# Altium PCB 606-100868-r02.pcbdoc (part 2 of 2)
Units mm, origin at the board's own origin, x right, y up, seen from the top; angles counter-clockwise.
Board outline 50 x 10 mm, 2 copper layers (Top Layer, Bottom Layer), stack 1.471 mm thick; 23 components, 9 nets, 72 pads, 29 vias.
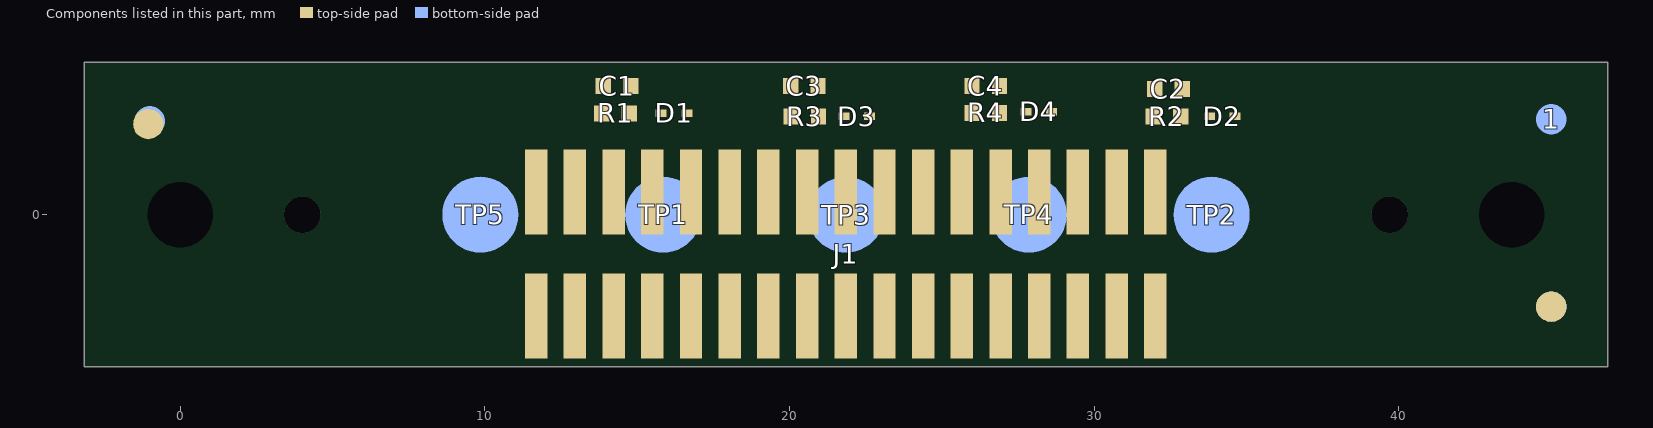
[diagram p2: the components of this part, seen from the top]

## Silkscreen, mask and mechanical layers (free items; w line width, h text height) (continued)
DXF_BOT:
  circle w0.013: c33.321,27 r1.25
  circle w0.013: c27.321,27 r1.25
  circle w0.013: c21.321,27 r1.25
  circle w0.013: c15.321,27 r1.25
  circle w0.013: c9.321,27 r1.25
  circle w0.013: c-0.529,27 r1.075
  circle w0.013: c39.171,27 r0.6
  circle w0.013: c-0.529,27 r2.1
  circle w0.013: c3.471,27 r0.6
  circle w0.013: c43.171,27 r2.1
  circle w0.013: c43.171,27 r1.075
  circle w0.013: c39.7,0 r0.6
  circle w0.013: c4,0 r0.6
  circle w0.013: c43.7,0 r2.1
  circle w0.013: c0,0 r2.1
  circle w0.013: c0,0 r1.075
  circle w0.013: c43.7,0 r1.075
  circle w0.013: c9.85,0 r1.25
  circle w0.013: c15.85,0 r1.25
  circle w0.013: c21.85,0 r1.25
  circle w0.013: c27.85,0 r1.25
  circle w0.013: c33.85,0 r1.25
  lines w0.013: -3.679,22 46.321,22 46.321,32 -3.679,32 -3.679,22 ; -3.15,-5 46.85,-5 46.85,5 -3.15,5 -3.15,-5
  text "SECONDARY" at -44.092,25.232 h3.17
Drill Drawing:
  lines w0.254: 109.64,-7.45 110.063,-7.45 110.487,-7.873 110.91,-7.45 111.333,-7.45 110.91,-7.027 111.333,-6.603 110.91,-6.603 110.487,-6.18 110.063,-6.603 109.64,-6.603 110.063,-7.027 109.64,-7.45 ; 109.64,-2.37 111.333,-2.37 110.487,-4.063 109.64,-2.37 ; 109.64,-0.253 111.333,-0.253 111.333,1.44 109.64,1.44 109.64,-0.253
  lines w0.381: 108.121,-9.016 314.669,-9.016 ; 108.121,2.414 314.669,2.414 ; 122.114,-12.826 122.114,6.224 ; 135.826,-12.826 135.826,6.224 ; 163.504,-12.826 163.504,6.224 ; 176.353,-12.826 176.353,6.224 ; 194.992,-12.826 194.992,6.224 ; 233.08,-12.826 233.08,6.224 ; 248.063,-12.826 248.063,6.224 ; 267.006,-12.826 267.006,6.224 ; 286.051,-12.826 286.051,6.224 ; 108.121,-12.826 314.669,-12.826 314.669,6.224 108.121,6.224 108.121,-12.826
  text "Symbol" at 110.407,3.557 h1.83
  text "Count" at 123.257,3.557 h1.83
  text "Hole Size" at 136.969,3.557 h1.83
  text "Plated" at 164.647,3.557 h1.83
  text "Hole Type" at 177.496,3.557 h1.83
  text "Drill Layer Pair" at 196.135,3.557 h1.83
  text "Via/Pad" at 234.223,3.557 h1.83
  text "Pad Shape" at 249.206,3.557 h1.83
  text "Template" at 268.149,3.557 h1.83
  text "Hole Tolerance" at 287.194,3.557 h1.83
  text "29" at 123.257,-0.253 h1.52
  text "0.250mm (9.84mil)" at 136.969,-0.253 h1.52
  text "PTH" at 164.647,-0.253 h1.52
  text "Round" at 177.496,-0.253 h1.52
  text "Top Layer - Bottom Layer" at 196.135,-0.253 h1.52
  text "Via" at 234.223,-0.253 h1.52
  text "Rounded" at 249.206,-0.253 h1.52
  text "v50h25m0mx0" at 268.149,-0.253 h1.52
  text "2" at 123.257,-4.063 h1.52
  text "1.200mm (47.24mil)" at 136.969,-4.063 h1.52
  text "NPTH" at 164.647,-4.063 h1.52
  text "Round" at 177.496,-4.063 h1.52
  text "Top Layer - Bottom Layer" at 196.135,-4.063 h1.52
  text "Pad" at 234.223,-4.063 h1.52
  text "Rounded" at 249.206,-4.063 h1.52
  text "c120hn120" at 268.149,-4.063 h1.52
  text "2" at 123.257,-7.873 h1.52
  text "2.150mm (84.65mil)" at 136.969,-7.873 h1.52
  text "NPTH" at 164.647,-7.873 h1.52
  text "Round" at 177.496,-7.873 h1.52
  text "Top Layer - Bottom Layer" at 196.135,-7.873 h1.52
  text "Pad" at 234.223,-7.873 h1.52
  text "Rounded" at 249.206,-7.873 h1.52
  text "c200hn215" at 268.149,-7.873 h1.52
  text "33 Total" at 123.257,-11.683 h1.52
  text ".Layer_Name" at 3.975,-17.1 h3.81

## Text inside footprints (layer, text, board x,y; h text height)
D1: Mechanical 32 "A" at 16.965,3.005 h0.64; Mechanical 32 "C" at 14.96,3.013 h0.64
D2: Mechanical 32 "A" at 34.965,2.904 h0.64; Mechanical 32 "C" at 32.96,2.912 h0.64
D3: Mechanical 32 "A" at 22.961,2.905 h0.64; Mechanical 32 "C" at 20.956,2.913 h0.64
D4: Mechanical 32 "A" at 28.939,3.055 h0.64; Mechanical 32 "C" at 26.934,3.063 h0.64
J1: Top Overlay "1" at 32.9,0.731 h0.76